# Altium PCB Weather Station Debug v2.PcbDoc
Units mm, origin at the board's own origin, x right, y up, seen from the top; angles counter-clockwise.
Board outline 103.6 x 103 mm, 2 copper layers (Top Layer, Bottom Layer); 39 components, 36 nets, 176 pads, 14 vias.
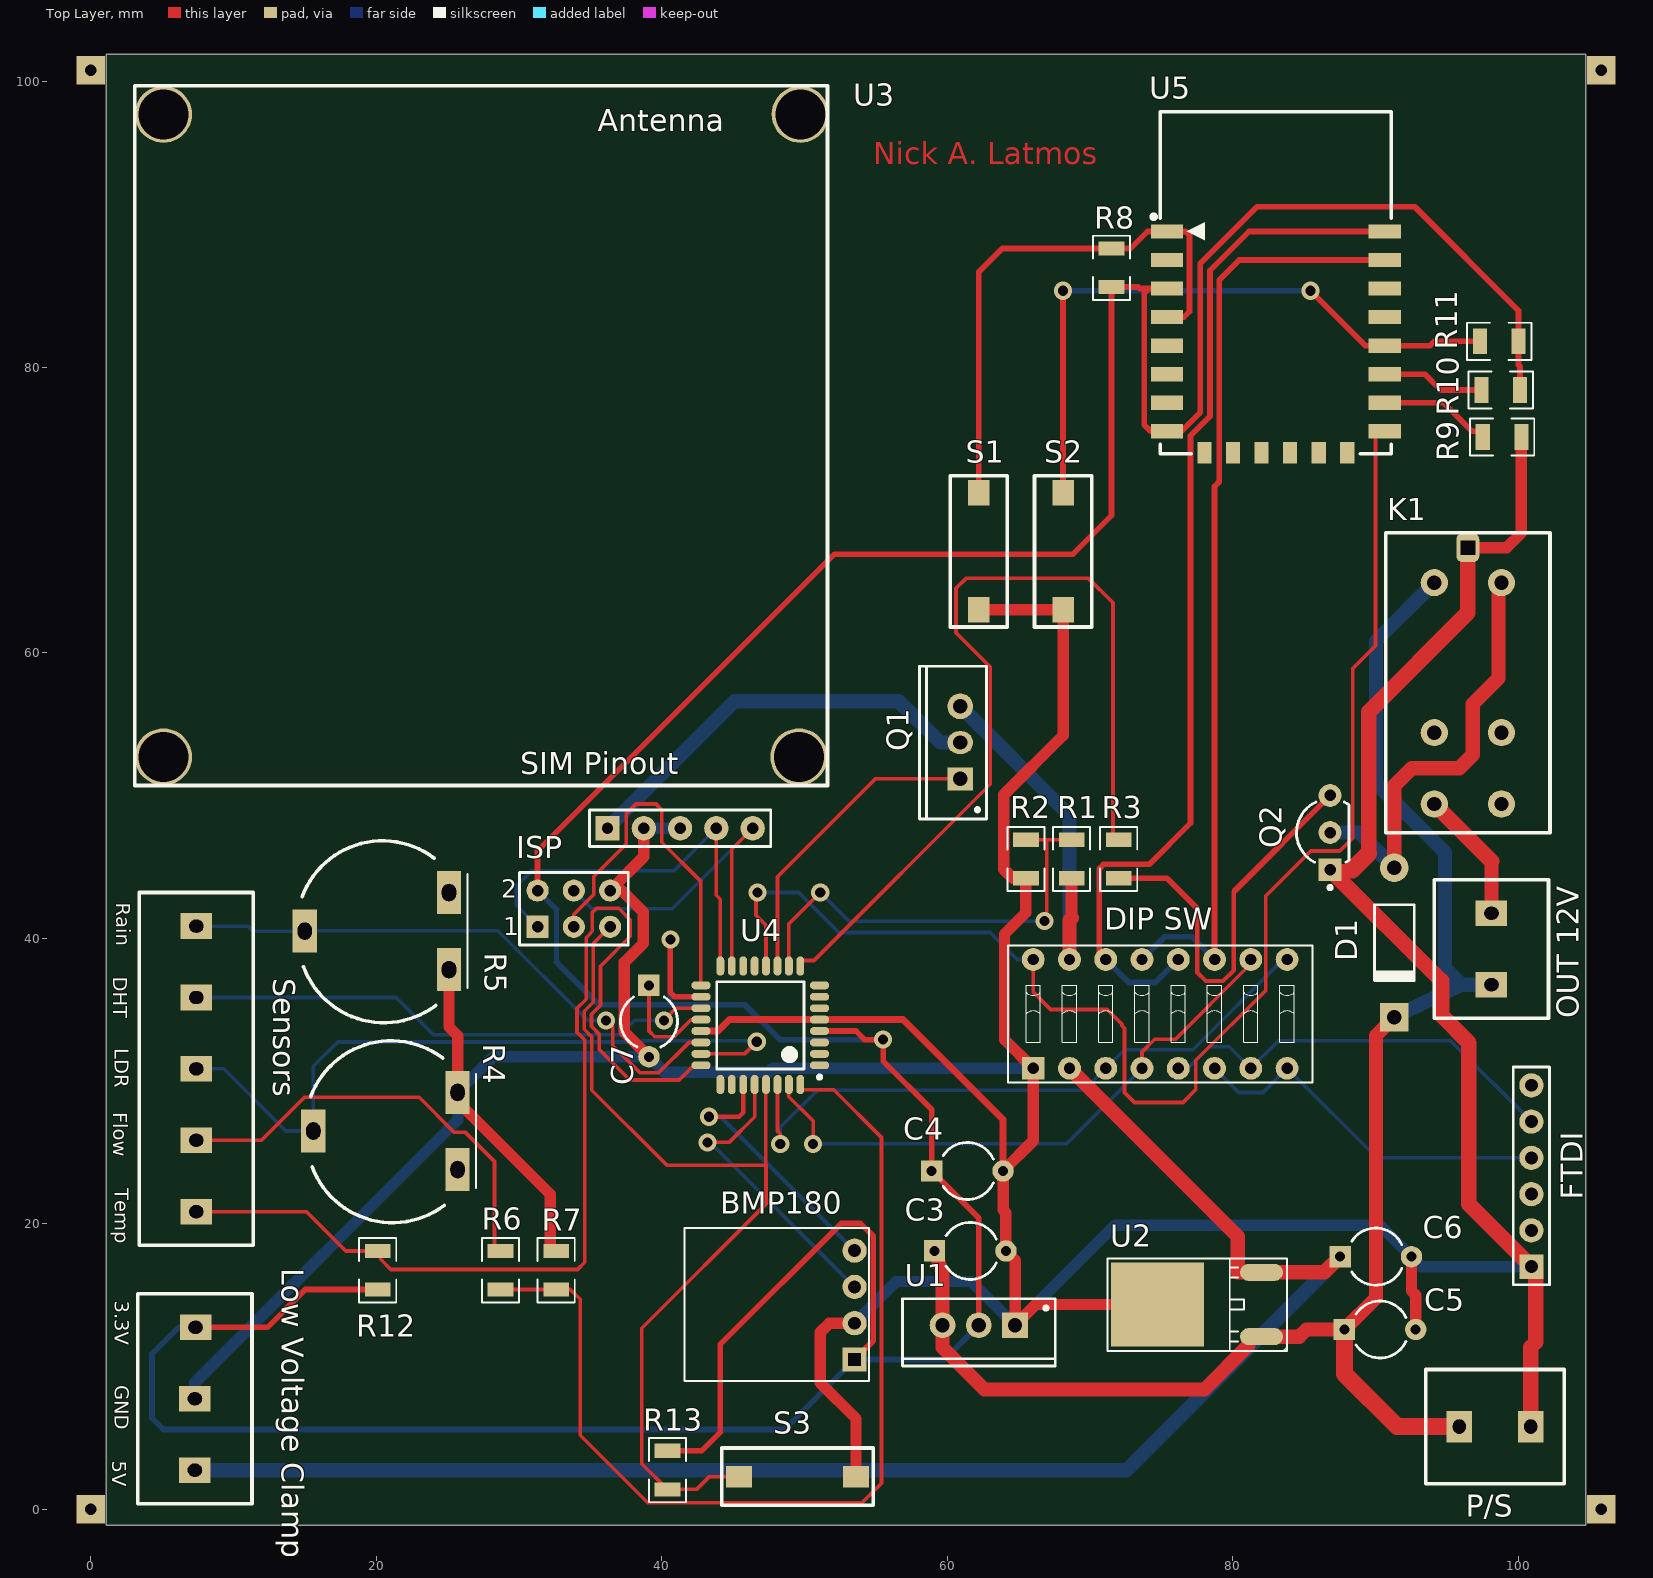
[diagram p0: Top Layer view]
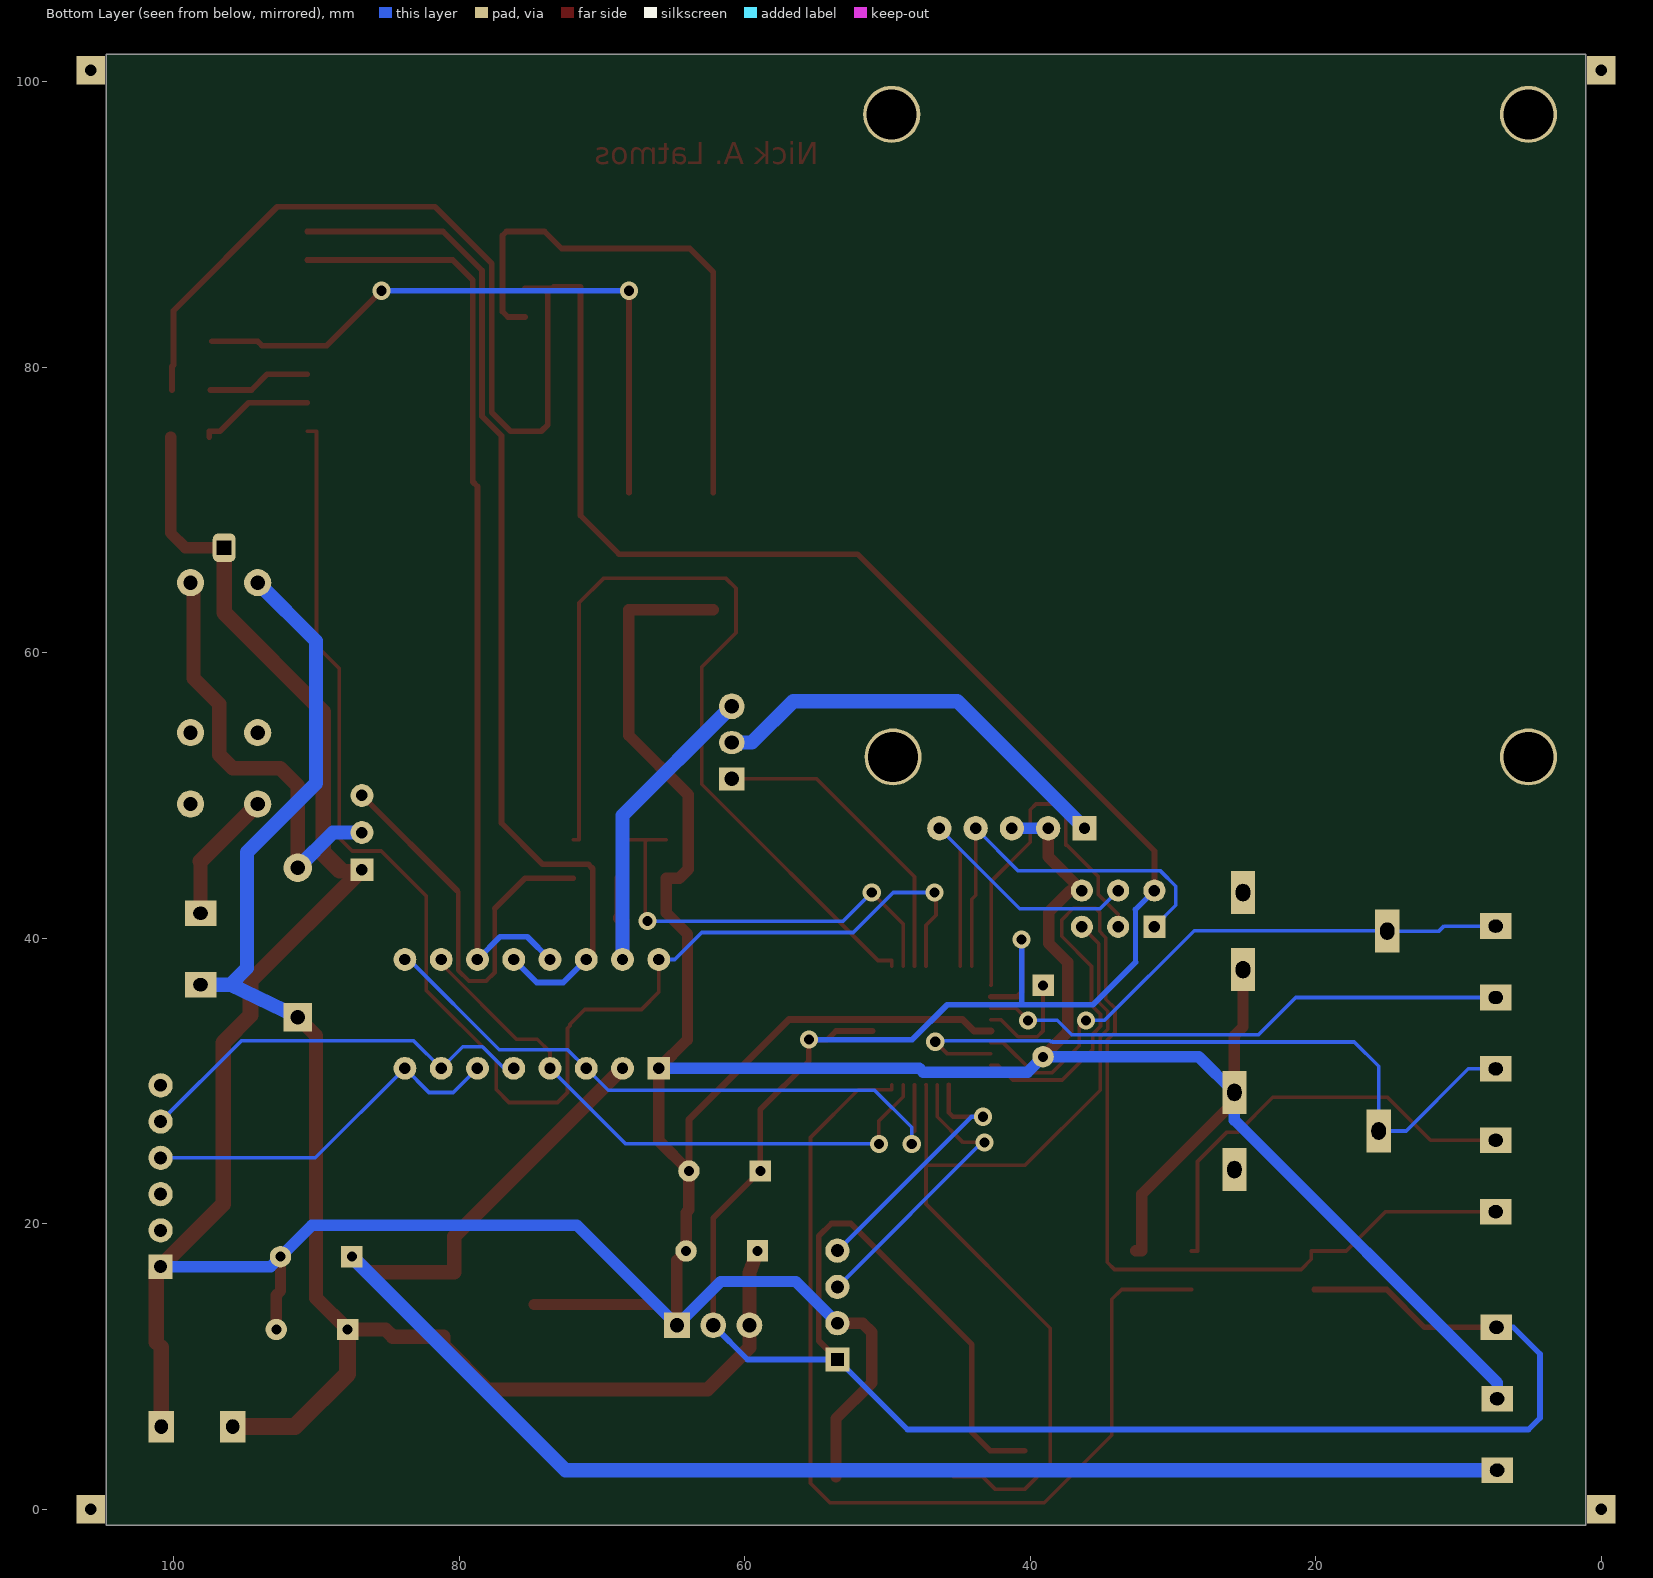
[diagram p1: Bottom Layer view, seen from below]

## Layer stack, top to bottom
Top Solder: solder mask 0.0102, Solder Resist, Dk 3.5
Top Layer: signal copper 0.0356
Dielectric 1: dielectric 0.32, FR-4, Dk 4.8
Bottom Layer: signal copper 0.0356
Bottom Solder: solder mask 0.0102, Solder Resist, Dk 3.5

## Board outline
1.1,-1.1 1.1,101.9 104.7,101.9 104.7,-1.1 1.1,-1.1

## Design rules (kind name [scope] priority, off if disabled: settings)
Clearance "LV Clearance" [InNetClass('LV')] p1: gap=0.25
Clearance "HV Clearance" [InNetClass('HV') vs InNetClass('HV')] p2: gap=0.4
Clearance [All] p3: gap=0.25
PolygonConnect [All] p1: connectstyle=Relief reliefconductorwidth=0.254 reliefentries=4 polygonreliefangle="90 Angle" airgapwidth=0.254
RoutingVias [All] p1: holewidth=0.711 width=1.27 viastyle="Through Hole" minholewidth=0.711 minwidth=1.27 maxholewidth=0.711 maxwidth=1.27
SMDNeckDown [All] p1: percent=90.000
SolderMaskExpansion [All] p1: expansion=0.102
UnpouredPolygon [All] p1: allowunpoured=FALSE
Width 3.3 [InNet('3.3V')] p1: maxlimit=0.6 minlimit=0.254 preferedwidth=0.4
Width GND [InNet('GND')] p2: maxlimit=1.2 minlimit=0.35 preferedwidth=0.8
Width "Processor Width" [InNetClass('Processor')] p3: maxlimit=0.3 minlimit=0.254 preferedwidth=0.254
Width "LV Width" [InNetClass('LV')] p4: maxlimit=0.6 minlimit=0.3 preferedwidth=0.4
Width "HV Width" [InNetClass('HV')] p5: maxlimit=1.2 minlimit=0.8 preferedwidth=1
Width [All] p6: maxlimit=0.35 minlimit=0.254 preferedwidth=0.254
29 further rules are at their usual default settings.

## Classes and differential pairs
net class Processor: 3.3V DHT22_DATA DS18B20_DQ FLOW_METER GND GPRS_CONTROL_PIN GPRS_STATUS LDR_PIN MCU_RX0 MCU_RX1 MCU_TX0 MCU_TX1 NetC7_1 NetISP_3 NetISP_5 RAIN_PIN SCL0 SDA0 VALVE_CONTROL_PIN WIFI_ENABLE
net class HV: 5V 12V_BAT GND GPRS_ENABLE MOSFET_DRAIN NetD1_1 NetK1_7
net class LV: 3.3V GND GPRS_STATUS NetQ2_3 NetR8_1 NetR9_1 NetR10_1 NetR11_1 VALVE_CONTROL_PIN WIFI_ENABLE WIFI_RX WIFI_TX

## Components (designator, comment, footprint, x,y, rotation, side; value= is the part's Value field where it differs from the comment)
BMP180 "BMP180" BMP180 54.5,8.7 r90 top
C3 "Cap2" CAPR5-4X5 61.6,18.1 r0 top
C4 "Cap2" CAPR5-4X5 61.4,23.7 r0 top
C5 "Cap2" CAPR5-4X5 90.3,12.6 r0 top
C6 "Cap2" CAPR5-4X5 90,17.7 r0 top
C7 "Cap2" CAPR5-4X5 39.1,34.2 r270 top
D1 "Diode 1N4004" DO-41 91.3,39.7 r270 top
"DIP SW" "418117170908" 418117170908 74.9,34.7 r0 top
FTDI "Header 6" HDR1X6 100.9,17 r90 top
ISP "Header 3X2" HDR2X3 31.3,40.8 r0 top
K1 "Relay" "Matsushita Relay 12V" 90.7,68.4 r270 top
"Low Voltage Clamp" "Clamp x3" "Connector x3 clamps" 11.3,0.4 r90 top
"OUT 12V" "Homemade Connector" "Connector (Clamp?)" 102.1,34.4 r90 top
P/S "Homemade Connector" "Connector (Clamp?)" 93.5,1.8 r0 top
Q1 "PMOS-2" TO-220AB 60.9,53.7 r90 top
Q2 "BC639-16ZL1G" ONSC-TO-92-3-29-11_AM_BL 86.8,47.4 r90 top
R1 "smd resistor 4x2mm" "smd resistor 4x2mm" 69.8,47.6 r180 top
R2 "smd resistor 4x2mm" "smd resistor 4x2mm" 64.4,43.5 r0 top
R3 "smd resistor 4x2mm" "smd resistor 4x2mm" 70.9,43.5 r0 top
R4 "RPot" "potentiometer (Piher)" 26.6,22.5 r90 top
R5 "RPot" "potentiometer (Piher)" 26,36.5 r90 top
R6 "smd resistor 4x2mm" "smd resistor 4x2mm" 29.8,18.8 r180 top
R7 "smd resistor 4x2mm" "smd resistor 4x2mm" 33.7,18.8 r180 top
R8 "smd resistor" "smd resistor 4x2mm" 72.6,89 r180 top
R9 "smd resistor 4x2mm" "smd resistor 4x2mm" 96.8,76.2 r270 top
R10 "smd resistor 4x2mm" "smd resistor 4x2mm" 96.7,79.5 r270 top
R11 "smd resistor 4x2mm" "smd resistor 4x2mm" 96.6,82.9 r270 top
R12 "smd resistor 4x2mm" "smd resistor 4x2mm" 21.2,18.8 r180 top
R13 "smd resistor 4x2mm" "smd resistor 4x2mm" 39.3,0.7 r0 top
S1 "SW-PB" "SMD push button 10x4" 62.2,62.1 r0 top
S2 "SW-PB" "SMD push button 10x4" 68.1,72.1 r180 top
S3 "SW-PB" "SMD push button 10x4" 44.5,2.3 r270 top
Sensors "Clamp x5" "Connector Clamp (x5)" 3.4,43.2 r270 top
"SIM Pinout" "Header 5" HDR1X5 36.2,47.7 r0 top
U1 "LM1117T-3.3" T03B 62.2,12.9 r180 top
U2 "L7805" DPAK 82,12.1 r180 top
U3 "SIM900" SIM900 3.1,50.7 r0 top
U4 "ATmega328P-AU" 32A_L 46.9,33.9 r180 top
U5 "ESP_12_E" ESP_12_E 75,89.5 r0 top

## Footprints (in the part's own frame and the unit in brackets; to place one, negate y for a bottom-side part, rotate by r counter-clockwise, add the part's x,y. Pads: shape width x height; smd on the part's side, far side on the other; paste and mask are expansions set on the pad)
32A_L [mm] "Thin QFP, 32-Leads, Body 7x7mm, Pitch 0.8mm, IPC High Density"
  oval 1.35x0.55 smd: 1(-4.15,2.8) 2(-4.15,2) 3(-4.15,1.2) 4(-4.15,0.4) 5(-4.15,-0.4) 6(-4.15,-1.2) 7(-4.15,-2) 8(-4.15,-2.8) 17(4.15,-2.8) 18(4.15,-2) 19(4.15,-1.2) 20(4.15,-0.4) 21(4.15,0.4) 22(4.15,1.2) 23(4.15,2) 24(4.15,2.8)
  oval 0.55x1.35 smd: 9(-2.8,-4.15) 10(-2,-4.15) 11(-1.2,-4.15) 12(-0.4,-4.15) 13(0.4,-4.15) 14(1.2,-4.15) 15(2,-4.15) 16(2.8,-4.15) 25(2.8,4.15) 26(2,4.15) 27(1.2,4.15) 28(0.4,4.15) 29(-0.4,4.15) 30(-1.2,4.15) 31(-2,4.15) 32(-2.8,4.15)
  silkscreen extent -4.28,-3.05 3.05,3.75, body extent -3.5,-3.5 3.5,3.5, height 1.2
418117170908 [mm] "08p, 2.54mm Pitch, Horizontal, Box Type, THT, flat Actuator, red, without Tape, Tube"
  rect 1.6x1.6 hole 0.8: 1(-8.89,-3.81)
  round 1.6 hole 0.8: 2(-6.35,-3.81) 3(-3.81,-3.81) 4(-1.27,-3.81) 5(1.27,-3.81) 6(3.81,-3.81) 7(6.35,-3.81) 8(8.89,-3.81) 9(8.89,3.81) 10(6.35,3.81) 11(3.81,3.81) 12(1.27,3.81) 13(-1.27,3.81) 14(-3.81,3.81) 15(-6.35,3.81) 16(-8.89,3.81)
  silkscreen extent -10.66,-4.8 10.66,4.8, body extent -10.66,-4.8 10.66,4.8, height 5.2
BMP180 [mm]
  rect 1.7x1.7 hole 0.9 square: 1(1.8,1)
  round 1.7 hole 0.9: 2(4.34,1) 3(6.88,1) 4(9.42,1)
  silkscreen extent 0.3,0 11,12.9
CAPR5-4X5 [mm] "Capacitor; 2 Leads"
  rect 1.5x1.5 hole 0.7: 1(-2.5,0)
  round 1.5 hole 0.7: 2(2.5,0)
  silkscreen extent -1.69,-2 1.82,2
"Connector (Clamp?)" [mm]
  rect 1.8x2.2 hole 0.9 slot 1 at 90 deg: 1(2.35,4) 2(7.35,4)
  silkscreen extent 0,0 9.7,8
"Connector Clamp (x5)" [mm]
  rect 1.8x2.2 hole 0.9 slot 1 at 90 deg: 1(2.35,4) 2(7.35,4) 3(12.35,4) 4(17.35,4) 5(22.35,4)
  silkscreen extent 0,0 24.7,8
"Connector x3 clamps" [mm]
  rect 1.8x2.2 hole 0.9 slot 1 at 90 deg: 1(2.35,4) 2(7.35,4) 3(12.35,3.95)
  silkscreen extent 0,0 14.7,8
DO-41 [mm] "Diode, Axial; Body 5.2 x 2.7 mm (LxDia. max), Lead Dia. 0.86 mm (max)"
  round 2 hole 1: 1(-5.23,0)
  rect 2x2 hole 1: 2(5.23,0)
  silkscreen extent -2.65,-1.4 2.75,1.4
DPAK [mm]
  oval 3x1.2 smd: 1(0,0) 3(0,-4.5)
  rect 6.5x5.9 smd: 2(7.275,-2.25)
  silkscreen extent -1.78,-5.46 10.79,1.02, body extent -0.5,-5.48 9.44,1.06, height 2.41
ESP_12_E [mm] "ESP-12 Wi-Fi Module by AI-Thinker"
  rect 2.25x1 smd: 1(0.375,0) 2(0.375,-2) 3(0.375,-4) 4(0.375,-6) 5(0.375,-8) 6(0.375,-10) 7(0.375,-12) 8(0.375,-14) 15(15.625,-14) 16(15.625,-12) 17(15.625,-10) 18(15.625,-8) 19(15.625,-6) 20(15.625,-4) 21(15.625,-2) 22(15.625,0)
  rect 1x1.5 smd: 9(3,-15.5) 10(5,-15.5) 11(7,-15.5) 12(9,-15.5) 13(11,-15.5) 14(13,-15.5)
  silkscreen extent -0.7,-15.57 16.08,8.37, body extent 0,-15.49 16,8.51, height 2.75
HDR1X5 [mm] "Connector; Header; 5 Position"
  rect 1.7x1.7 hole 0.8 paste+0: 1(0,0)
  round 1.7 hole 0.8 paste+0: 2(2.54,0) 3(5.08,0) 4(7.62,0) 5(10.16,0)
  silkscreen extent -1.27,-1.27 11.43,1.27
HDR1X6 [mm] "Connector; Header; 6 Position"
  rect 1.7x1.7 hole 0.9: 1(0,0)
  round 1.7 hole 0.9: 2(2.54,0) 3(5.08,0) 4(7.62,0) 5(10.16,0) 6(12.7,0)
  silkscreen extent -1.27,-1.27 13.97,1.27
HDR2X3 [mm] "Connector; Header; 3x2 Position"
  rect 1.55x1.55 hole 0.8: 1(0,0)
  round 1.55 hole 0.8: 2(0,2.54) 3(2.54,0) 4(2.54,2.54) 5(5.08,0) 6(5.08,2.54)
  silkscreen extent -1.27,-1.27 6.35,3.81
"Matsushita Relay 12V" [mm]
  round 1.9 hole 1: 1(19,8.1) 2(14,8.1) 3(3.5,8.1) 5(3.5,3.4) 6(14,3.4) 7(19,3.4)
  rrect50% 2x1.6 hole 1 square: 4(1.05,5.75)
  silkscreen extent 0,0 21,11.5
ONSC-TO-92-3-29-11_AM_BL [mm] "TO, 3-Leads, Body Dia 4.7mm, Pitch 2.6mm"
  rect 1.6x1.6 hole 0.8: 1(-2.6,0)
  round 1.6 hole 0.8: 2(0,0) 3(2.6,0)
  silkscreen extent -3.97,-1.34 2.13,2.35, body extent -2.84,-1.34 2.84,2.36, height 8.92
"potentiometer (Piher)" [mm]
  rect 3x1.7 hole 1 slot 1.2 at 0 deg: 1(1.3,0.9) 2(6.7,0.9) 3(4,11)
  silkscreen extent -2.42,-0.4 10.32,11.19
SIM900 [mm]
  round 4 hole 3.5 unplated: 6(2,47) 7(46.6,47) 8(46.5,2) 9(2,2)
  silkscreen extent 0,0 48.5,49
"SMD push button 10x4" [mm]
  rect 1.5x1.8 smd: 1(0,0.9) 2(0,9.1)
  silkscreen extent -2,-0.3 2,10.3
"smd resistor 4x2mm" [mm]
  rect 1.8x1 smd: 1(1.1,0.7) 2(1.1,3.4)
  silkscreen extent -0.2,-0.2 2.4,4.3
T03B [mm] "TO, Thru-Hole, Vertical, Heatsink Mounted; 3 In-Line Leads; Pitch 2.54 mm"
  rect 1.8x1.8 hole 1: 1(-2.54,0)
  round 1.8 hole 1: 2(0,0) 3(2.54,0)
  silkscreen extent -5.35,-1.85 5.35,2.85, body extent -5.4,-1.9 5.4,2.9, height 19.4
TO-220AB [mm] "TO, Thru-Hole, Vertical, Heatsink Mounted; 3 In-Line Leads; Pitch 2.54 mm"
  rect 1.6x1.8 hole 1: 1(-2.54,0)
  oval 1.6x1.8 hole 1: 2(0,0)
  round 1.8 hole 1: 3(2.54,0)
  silkscreen extent -5.35,-1.85 5.35,2.85, body extent -5.4,-1.9 5.4,2.9, height 19.3

## Part data
C3 C4 C5 C6 C7: "Capacitor"
D1: "1 Amp General Purpose Rectifier"
"DIP SW": "2.54 mm Compact THT Dip Switch with Flat Actuator WS-DITV"
FTDI: "Header, 6-Pin"
ISP: "Header, 3-Pin, Dual row"
K1: "SPDT Relay"
"OUT 12V" P/S: library part "Header 2", "Klema"
Q1: "P-Channel Power MOSFET"
Q2: "High Current Transistor, NPN Silicon, 3-Pin TO-92, Pb-Free, Ammo Box"
R1 R2 R3 R6 R7 R8 R9 R10 R11 R12 R13: library part Res3
R4 R5: "Potentiometer"
S1 S2 S3: "Switch"
"SIM Pinout": "Header, 5-Pin"
U1: "800mA Low-Dropout Linear Regulator, 3-pin TO-220"
U2: library part L7805-DPAK, "LINEAR REGULATOR 5.0V"
U4: "8-bit AVR Microcontroller, 32KB Flash, 1KB EEPROM, 2KB SRAM, 32-pin TQFP, Industrial Grade (-40°C to 85°C)"
U5: "ESP-12 Wi-Fi Module by AI-Thinker"

## Free pads (board coordinates)
  rect 2x2 hole 0.8 unplated: 0(0,0) 1(0,100.8) 2(105.8,100.8) 3(105.8,0)

## Via types
v1: diameter 1.27, hole 0.711, Top Layer to Bottom Layer, 14 vias

## Nets (pads, with @x,y where several pads share a name; then routed paths per layer and width w, separated by ;. In a path a pad name is that pad's centre, name@x,y a point inside that pad or via, vN(x,y) a via of type N, cw(c..) or ccw(c..) an arc to the next point about the centre after c; other vN are vias at no path point)
3.3V: "Low Voltage Clamp.3" BMP180.1 C4.1 ISP.2 R8.2 R10.2 R11.2 R12.2 R13.2 U1.2 U4.4 U4.18 U5.3 U5.8 | length 316.2
  Top Layer w0.4: 7.35,12.75 12.387,12.75 15.037,15.4 R12.2 ; ISP.2 31.3,46.1 52.1,66.9 68.8,66.9 71.5,69.6 R8.2 73.372,85.6 73.472,85.5 74.127,85.5 ; R13.2 42.79,4.1 44.086,5.396 44.086,11.543 52.57,20.026 53.916,20.026 54.805,19.137 54.805,11.805 BMP180.1 ; v1(40.6,39.9) 40.6,36.2 40.9,35.9 U4.18 ; U4.4 53.6,33.5 54.2,32.9 v1(55.5,32.9) 55.5,31.4 58.9,28 C4.1 62.2,20.4 U1.2 ; U5.3 74.127,85.5 ; R10.2 100.1,80.047 100,80.147 R11.2 100,83.95 92.727,91.223 81.678,91.223 77.711,87.256 77.711,76.811 76.4,75.5 U5.8 74.236,75.5 73.779,75.957 73.779,85.152 74.127,85.5
  Bottom Layer w0.35: 32.631,38.319 32.631,42.009
  Bottom Layer w0.4: 7.35,12.75 6.164,12.75 4.3,10.886 4.3,6.4 5.1,5.6 48.6,5.6 BMP180.1 59.8,10.5 U1.2 ; ISP.2 32.631,42.009 ; 32.631,38.319 35.607,35.343 40.7,35.343 ; v1(40.6,39.9) 40.6,35.443 40.7,35.343 ; v1(55.5,32.9) 48.255,32.9 45.812,35.343 40.7,35.343
5V: "DIP SW.2" "Low Voltage Clamp.1" C6.1 U2.3 | length 113.2
  Top Layer w1: 68.55,30.89 80.332,19.108 80.332,16.6 U2.3 86.4,16.6 C6.1
  Bottom Layer w1: 7.3,2.75 72.55,2.75 C6.1
12V_BAT: "OUT 12V.1" C3.1 C5.1 D1.2 K1.5 P/S.1 U1.3 U2.1 | length 114
  Top Layer w1: C3.1 59.66,16.582 U1.3 59.66,11.34 62.6,8.4 78.002,8.4 81.094,11.492 81.094,12.1 U2.1 84.65,12.1 85.15,12.6 C5.1 90.009,14.809 90.009,33.179 D1.2
  Top Layer w1.2: C5.1 87.8,9.5 91.5,5.8 P/S.1
  Bottom Layer w1: D1.2 96.008,36.75 ; K1.5 90.009,60.809 90.009,50.862 94.85,46.021 94.85,37.908 96.008,36.75 ; 98.1,36.75 96.008,36.75
DHT22_DATA: Sensors.2 U4.19 | length 37.2
  Top Layer w0.254: v1(40.149,34.25) 40.999,35.1 U4.19
  Bottom Layer w0.254: Sensors.2 21.405,35.85 24.016,33.238 37.097,33.238 38.109,34.25 v1(40.149,34.25)
DS18B20_DQ: R12.1 Sensors.5 U4.24 | length 76.6
  Top Layer w0.254: Sensors.5 15.123,20.85 17.873,18.1 R12.1 20.312,18.1 20.312,17.512 21.024,16.8 34.1,16.8 34.6,17.3 34.6,32.879 34.065,33.414 34.065,35.087 34.7,35.722 34.7,40.031 34.992,40.323 34.992,40.358 35.12,40.486 35.12,41.8 35.42,42.1 36.979,42.1 37.8,41.279 37.8,40.131 35.708,38.039 35.708,35.304 35.073,34.67 35.073,33.831 35.608,33.296 35.608,32.219 37.758,30.069 41.226,30.069 42.257,31.1 U4.24
FLOW_METER: R6.2 R7.2 U4.32 | length 70.7
  Top Layer w0.254: R6.2 30.65,15.4 R7.2 33.596,15.4 34.282,14.714 34.282,5.193 39.006,0.468 54.018,0.468 55.389,1.84 55.389,26.046 52.036,29.399 49.7,29.399 U4.32
FTDI_RX: "DIP SW.5" "DIP SW.7" FTDI.5 | length 29.1
  Bottom Layer w0.254: 76.17,30.89 76.852,30.89 78.362,32.4 79.74,32.4 81.25,30.89 83.188,32.828 95.232,32.828 FTDI.5
FTDI_TX: "DIP SW.6" "DIP SW.8" FTDI.4 | length 26.2
  Bottom Layer w0.254: 78.71,30.89 80.4,29.2 82.1,29.2 83.79,30.89 90.06,24.62 FTDI.4
GND: "DIP SW.1" "Low Voltage Clamp.2" "SIM Pinout.2" "SIM Pinout.3" BMP180.2 C3.2 C4.2 C5.2 C6.2 C7.2 FTDI.1 ISP.6 K1.4 P/S.2 Q2.1 R2.1 R4.2 R5.1 R7.1 R9.2 S1.1 S2.2 S3.2 U1.1 U2.2 U4.5 U4.21 | length 372.8
  Top Layer w0.49: 44.734,34.3 U4.5 56.9,34.3 63.9,27.3 C4.2
  Top Layer w0.495: U4.21 43.934,33.5 44.734,34.3
  Top Layer w0.8: R5.1 25.1,33.784 25.7,33.184 R4.2 25.7,28.561 32.199,22.062 32.199,18.1 R7.1 ; 38.74,47.7 38.74,45.7 ISP.6 37.199,43.34 38.7,41.839 38.7,39.634 37.37,38.304 37.37,33.43 C7.2 ; BMP180.2 51.74,13.04 51.1,12.4 51.1,8.861 53.6,6.361 S3.2 ; S1.1 S2.2 68.1,54.2 63.949,50.049 63.949,44.835 64.584,44.2 R2.1 65.5,41.796 64,40.296 64,32.9 66.01,30.89 66.01,25.81 C4.2 63.9,20.988 64.1,20.788 C3.2 64.74,17.46 U1.1 66.19,14.35 U2.2 ; Q2.1 88.352,44.8 ; C6.2 92.5,15.297 92.8,14.997 C5.2 ; K1.4 96.45,67.347 99.159,67.347 100.2,68.388 R9.2 ; 100.85,11.365 101.2,11.715 ; FTDI.1 FTDI.1@101.2,16.7
  Top Layer w1.1: Q2.1 94.6,37 94.6,34.6 96.512,32.688 96.512,21.388 FTDI.1 ; 89.5,45.948 89.5,55.839 96.45,62.789 K1.4@96.45,67.347 ; P/S.2 100.85,11.365 ; 101.2,11.715 FTDI.1@101.2,16.7
  Top Layer w1.2: 88.352,44.8 89.5,45.948
  Bottom Layer w0.8: 7.3,7.75 7.3,8.865 25.7,27.265 R4.2 28.2,31.7 C7.2 40.171,30.629 47.508,30.629 47.768,30.89 66.01,30.89 ; 38.74,47.7 41.28,47.7 ; BMP180.2 56.422,15.962 61.678,15.962 U1.1 71.74,19.9 90.3,19.9 C6.2 93.2,17 FTDI.1
GPRS_CONTROL_PIN: Q1.1 U4.11 | length 21.9
  Top Layer w0.254: U4.11 48.1,44.3 54.96,51.16 Q1.1
GPRS_ENABLE: "DIP SW.15" Q1.3 R1.2 | length 26.7
  Top Layer w0.85: 68.7,41.411 R1.2
  Top Layer w1: 68.55,38.51 68.55,41.261 68.7,41.411
  Bottom Layer w1: Q1.3 68.55,48.59 68.55,38.51
GPRS_STATUS: R1.1 R2.2 U4.10 | length 31.5
  Top Layer w0.254: U4.10 48.9,41 v1(51.1,43.2) ; R2.2 66.857,46.9 ; v1@66.946,41.254 66.946,46.811 66.857,46.9 ; R1.1 67.099,46.9 66.857,46.9
  Bottom Layer w0.254: v1(51.1,43.2) 53.1,41.2 v1(66.8,41.2)
LDR_PIN: R4.3 Sensors.3 U4.23 | length 50.6
  Top Layer w0.254: U4.23 45.796,31.9 v1(46.648,32.752)
  Bottom Layer w0.254: Sensors.3 9.314,30.85 13.664,26.5 R4.3 15.6,31.037 17.297,32.734 38.42,32.734 38.462,32.777 38.488,32.752 38.558,32.752 38.633,32.827 46.573,32.827 v1(46.648,32.752)
MCU_RX0: "DIP SW.3" "DIP SW.9" U4.30 | length 45.7
  Top Layer w0.254: U4.30 48.1,26.503 48.3,26.303 v1(48.3,25.6)
  Bottom Layer w0.254: v1(48.3,25.6) 48.3,26.755 50.904,29.359 69.559,29.359 71.09,30.89 72.4,32.2 77.189,32.2 83.499,38.51 83.79,38.51
MCU_RX1: "SIM Pinout.4" ISP.1 U4.16 | length 28.9
  Top Layer w0.254: 43.82,47.7 43.82,43.014 44.1,42.734 U4.16
  Bottom Layer w0.254: ISP.1 29.8,42.3 29.8,43.637 30.878,44.715 40.835,44.715 43.82,47.7
MCU_TX0: "DIP SW.4" "DIP SW.10" U4.31 | length 42.2
  Top Layer w0.254: U4.31 48.9,28.903 50.6,27.203 v1(50.6,25.6) ; 74.174,30.89 73.63,30.89 73.63,32.03 74.53,32.93 75.975,32.93 80.9,37.855 80.9,38.16 81.25,38.51
  Bottom Layer w0.254: v1(50.6,25.6) 68.34,25.6 73.63,30.89
MCU_TX1: "SIM Pinout.5" ISP.4 U4.15 | length 25.6
  Top Layer w0.254: U4.15 44.9,46.24 46.36,47.7
  Bottom Layer w0.254: ISP.4 35.106,42.074 40.734,42.074 46.36,47.7
MOSFET_DRAIN: "SIM Pinout.1" Q1.2 | length 29.6
  Bottom Layer w1: 36.2,47.7 45.1,56.6 56.6,56.6 59.5,53.7 Q1.2
NetC7_1: C7.1 U4.20 | length 7.5
  Top Layer w0.254: C7.1 39.1,33.5 39.5,33.1 40.849,33.1 42.049,34.3 U4.20
NetD1_1: D1.1 K1.3 Q2.2 | length 30.5
  Top Layer w1: D1.1 91.3,50.679 92.524,51.903 95.851,51.903 96.8,52.852 96.8,56.4 98.6,58.2 98.6,64.7 K1.3
  Bottom Layer w1: Q2.2 88.83,47.4 D1.1
NetISP_3: ISP.3 U4.17 | length 25.9
  Top Layer w0.254: ISP.3 33.84,41.665 35.247,43.072 35.247,44.334 37.456,46.544 37.5,46.5 37.5,48.7 38.2,49.4 39.6,49.4 40,49 40,46.719 42.74,43.979 42.74,36.7 U4.17
NetISP_5: ISP.5 R13.1 S3.1 U4.29 | length 64.9
  Top Layer w0.254: ISP.5 35.204,39.624 35.204,35.513 34.569,34.878 34.569,33.622 35.104,33.088 35.104,29.364 40.368,24.1 47.3,24.1 ; S3.1 43.335,2.3 42.435,1.4 R13.1 38.6,3.2 38.6,12.686 47.3,21.386 47.3,24.1 ; U4.29 47.288,29.738 47.288,24.112 47.3,24.1
NetK1_7: "OUT 12V.2" K1.7 | length 9.3
  Top Layer w1: 98.1,41.75 98.1,45.4
  Top Layer w1.1: K1.7 98.1,45.4
NetQ2_3: Q2.3 R3.1 | length 29
  Top Layer w0.3: 77.5,42.079 77.5,37.6 78.1,37 79.3,37 80.05,37.75 80.05,43.25 80.129,43.329
  Top Layer w0.4: R3.1 75.379,44.2 77.5,42.079 ; 80.129,43.329 Q2.3
NetR6_1: R6.1 Sensors.4 | length 30.7
  Top Layer w0.254: Sensors.4 11.962,25.85 14.978,28.866 23.004,28.866 25.468,26.402 26.255,26.402 28.287,24.37 28.287,18.1 R6.1
NetR8_1: R8.1 S1.2 U5.1 U5.4 | length 38.6
  Top Layer w0.4: S1.2 62.2,86.654 63.846,88.3 R8.1 72.814,88.3 74.014,89.5 U5.1 76.67,89.5 76.954,89.216 76.954,83.882 76.572,83.5 U5.4
NetR9_1: R9.1 U5.16 | length 8.1
  Top Layer w0.4: U5.16 94.734,77.5 96.734,75.5 97.5,75.5 R9.1
NetR10_1: R10.1 U5.17 | length 7.2
  Top Layer w0.4: U5.17 93.438,79.5 94.538,78.4 R10.1
NetR11_1: R11.1 S2.1 U5.18 | length 45.1
  Top Layer w0.4: S2.1 v1(68.1,85.341) ; v1(85.427,85.341) 89.267,81.5 U5.18 93.794,81.5 94.094,81.8 R11.1
  Bottom Layer w0.4: v1(68.1,85.341) v1(85.427,85.341)
RAIN_PIN: R5.3 Sensors.1 U4.22 | length 41.3
  Top Layer w0.254: v1(36.085,34.25) 36.161,34.25 36.568,33.844 36.568,32.472 38.467,30.573 39.773,30.573 41.9,32.7 U4.22
  Bottom Layer w0.254: Sensors.1 11.015,40.85 11.365,40.5 R5.3 15,40.524 28.516,40.524 34.79,34.25 v1(36.085,34.25)
SCL0: BMP180.3 U4.28 | length 21
  Top Layer w0.254: v1(43.2,25.7) 44.7,25.7 46.5,27.5 U4.28
  Bottom Layer w0.254: v1(43.2,25.7) 43.2,25.88 BMP180.3
SDA0: BMP180.4 U4.27 | length 18.6
  Top Layer w0.3: v1(43.3,27.5) 45.4,27.5 45.7,27.8 U4.27
  Bottom Layer w0.3: v1(43.3,27.5) 44.12,27.5 BMP180.4
VALVE_CONTROL_PIN: R3.2 U4.9 | length 62.5
  Top Layer w0.254: U4.9 49.7,38.441 50.665,38.441 63,50.777 63,59 60.6,61.4 60.6,64.5 61.3,65.2 69.88,65.2 71.594,63.486 71.594,46.9 R3.2
WIFI_ENABLE: "DIP SW.16" U4.12 U5.15 | length 99.8
  Top Layer w0.254: v1(46.7,43.2) 46.6,43.1 46.6,41.6 47.3,40.9 U4.12 ; 66.01,38.51 66.01,36.228 67.226,35.012 71.188,35.012 72.229,33.971 72.229,33.871 72.4,33.7 72.4,29.2 73.1,28.5 76.5,28.5 77.4,29.4 77.4,31.445 82.288,36.333 82.288,42.963 85.437,46.112 87.469,46.112 88.4,47.043 88.4,58.905 89.984,60.489 89.984,75.5 U5.15
  Bottom Layer w0.254: v1(46.7,43.2) 49.6,43.2 52.4,40.4 63,40.4 64.89,38.51 66.01,38.51
WIFI_RX: "DIP SW.11" "DIP SW.13" U5.21 | length 66.3
  Top Layer w0.4: 78.71,38.51 78.71,71.643 79.039,71.972 79.039,86.101 80.438,87.5 U5.21
  Bottom Layer w0.4: 73.63,38.51 75.22,40.1 77.12,40.1 78.71,38.51
WIFI_TX: "DIP SW.12" "DIP SW.14" U5.22 | length 73.3
  Top Layer w0.4: 71.09,38.51 70.629,38.971 70.629,44.868 70.934,45.172 74.134,45.172 77.03,48.068 77.03,75.195 78.389,76.554 78.389,86.765 81.124,89.5 U5.22
  Bottom Layer w0.4: 71.09,38.51 72.7,36.9 74.56,36.9 76.17,38.51
pads on no net: FTDI.2 FTDI.3 FTDI.6 K1.1 K1.2 K1.6 R4.1 R5.2 U3.6 U3.7 U3.8 U3.9 U4.1 U4.2 U4.3 U4.6 U4.7 U4.8 U4.13 U4.14 U4.25 U4.26 U5.2 U5.5 U5.6 U5.7 U5.9 U5.10 U5.11 U5.12 U5.13 U5.14 U5.19 U5.20

## Other copper
Top Layer:
  text "Nick A. Latmos" at 54.8,94.2 h1.52

## Silkscreen, mask and mechanical layers (free items; w line width, h text height)
Top Overlay:
  text "Rain" at 1.8,42.5 h1 r270
  text "DHT" at 1.6,37.3 h1 r270
  text "LDR" at 1.7,32.3 h1 r270
  text "Flow" at 1.6,27.8 h1 r270
  text "Temp" at 1.7,22.5 h1 r270
  text "3.3V" at 1.7,14.6 h1 r270
  text "GND" at 1.7,8.7 h1 r270
  text "5V" at 1.5,3.4 h1 r270

## Text inside footprints (layer, text, board x,y; h text height)
ISP: Top Overlay "1" at 28.9,40.2 h1.27; Top Overlay "2" at 28.76,42.832 h1.27
U3: Top Overlay "Antenna" at 35.5,96.5 h1.52
U5: Mechanical 13 "ANTENNA AREA" at 75.127,97.374 h0.25; Mechanical 13 "CUTOUT POLYGON" at 75.127,96.866 h0.25